# Altium PCB PCB2.PcbDoc
Units mil, origin at the board's own origin, x right, y up, seen from the top; angles counter-clockwise.
Board outline 7765 x 5060 mil, 2 copper layers (Top Layer, Bottom Layer); 92 components, 76 nets, 300 pads, 28 vias.
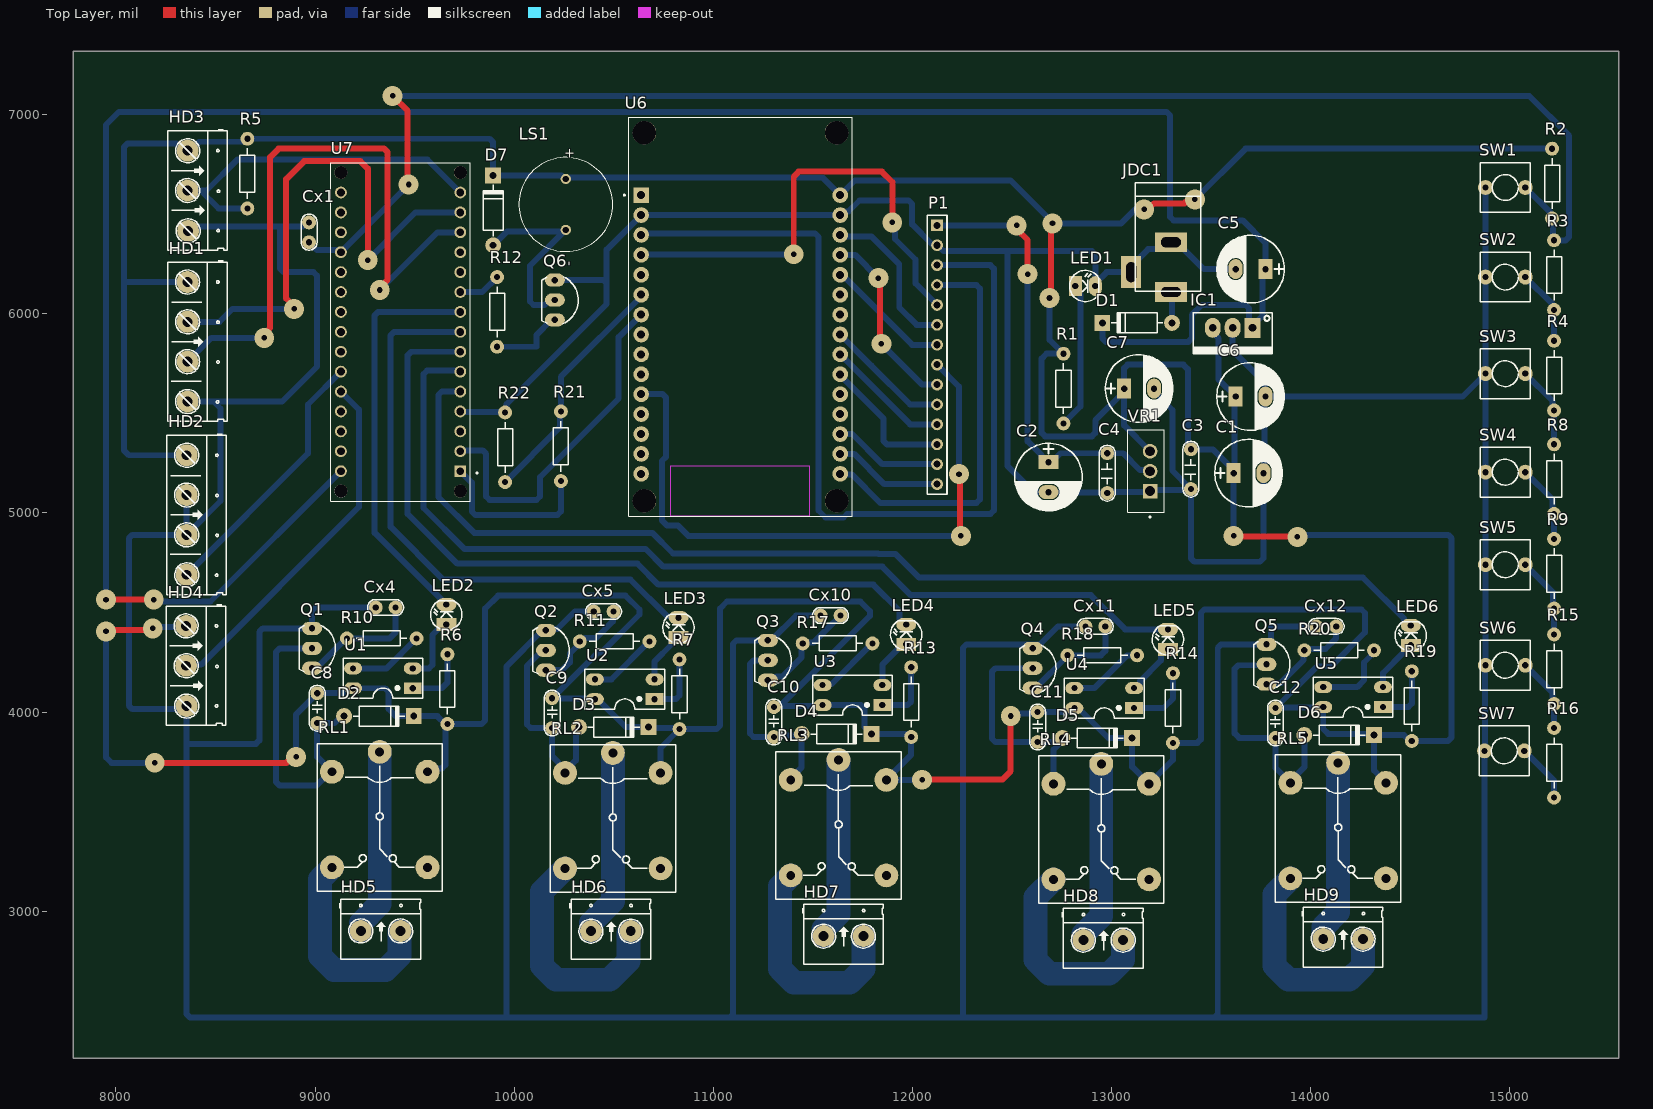
[diagram p0: Top Layer view]
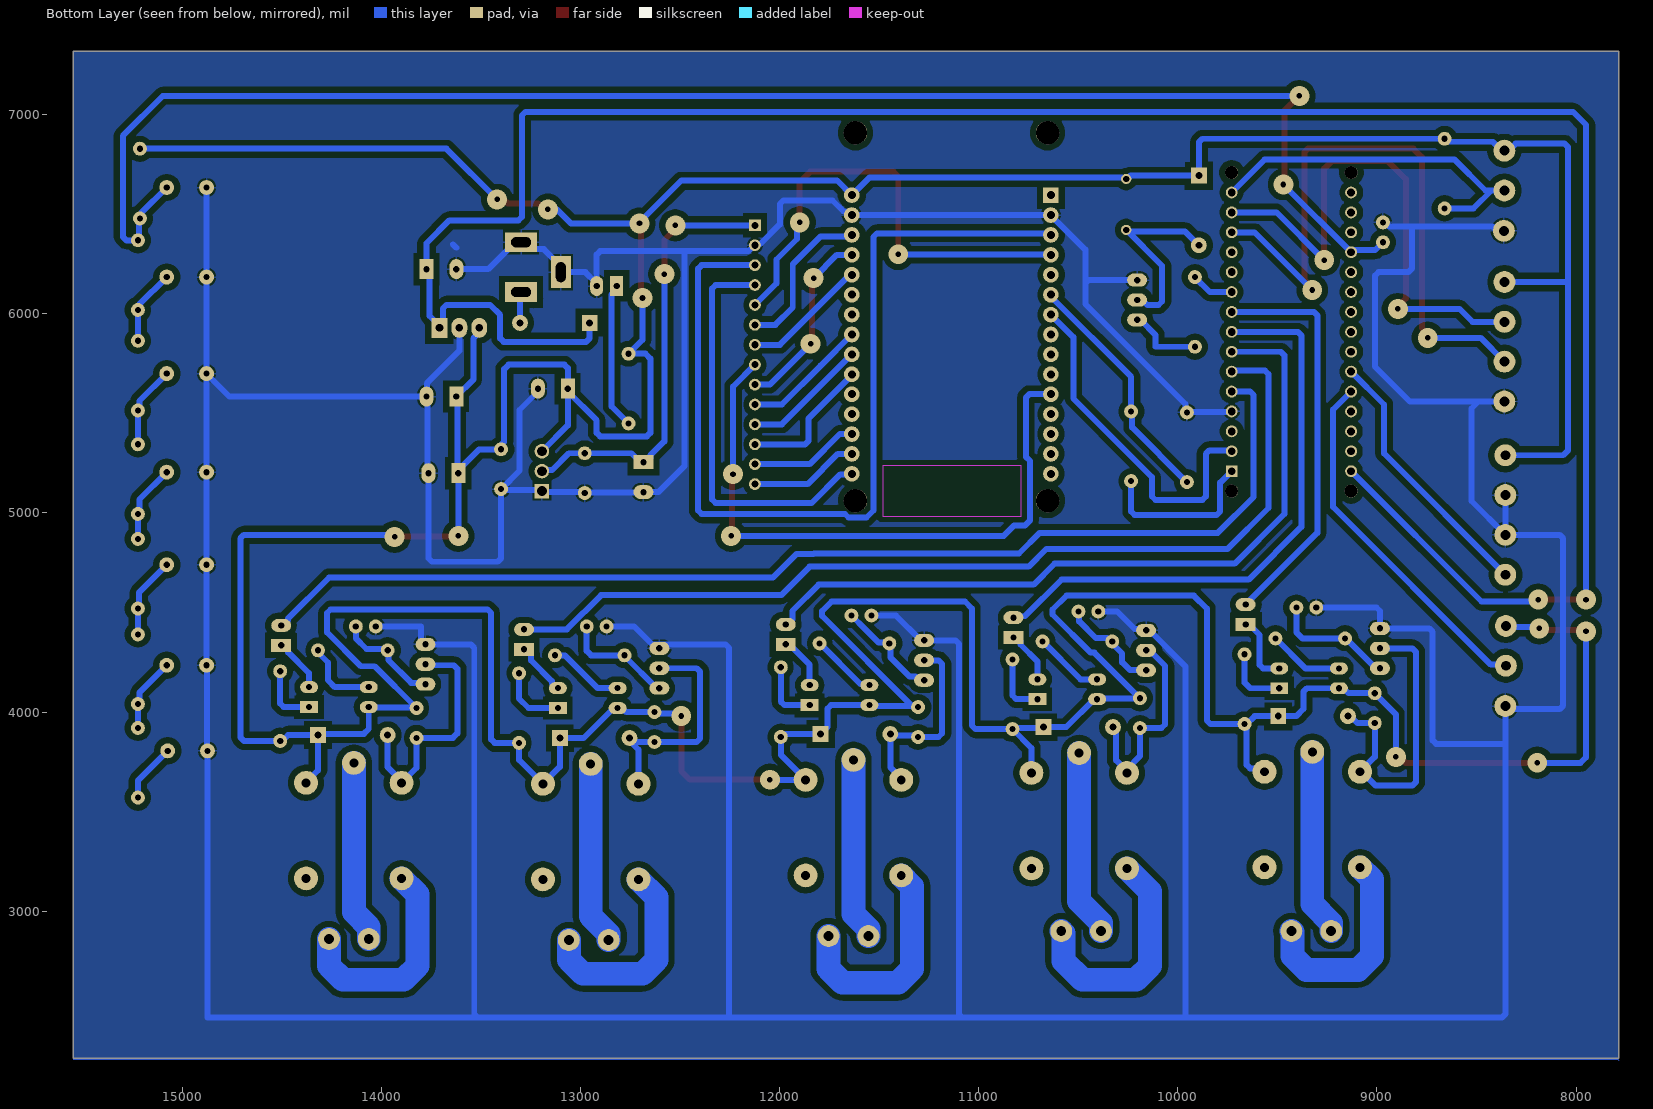
[diagram p1: Bottom Layer view, seen from below]
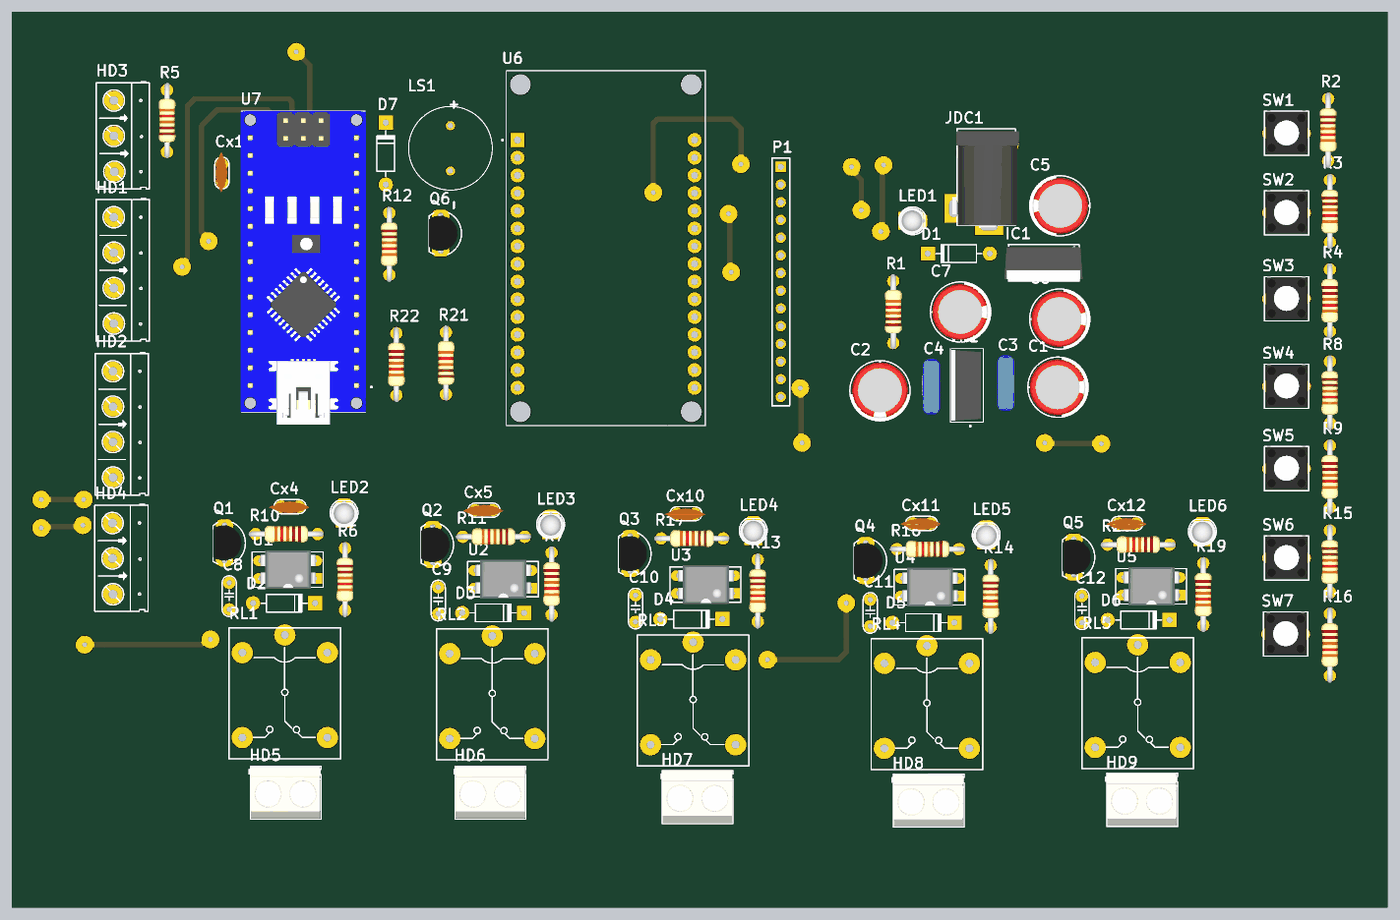
[diagram p2: 3D render of the assembled board from above, using the file's embedded part models]

## Layer stack, top to bottom
Top Solder: solder mask 0.4, Solder Resist, Dk 3.5
Top Layer: signal copper 1.4
Dielectric 1: dielectric 12.6, FR-4, Dk 4.8
Bottom Layer: signal copper 1.4
Bottom Solder: solder mask 0.4, Solder Resist, Dk 3.5

## Board outline
7785,2260 15550,2260 15550,7320 7785,7320

## Design rules (kind name [scope] priority, off if disabled: settings)
Clearance [All] p1: gap=10 ignorepadtopadclearanceinfootprint=FALSE except(0: Arc-Hole Track-Hole SMDPad-Hole THPad-Hole Via-Hole Fill-Hole Poly-Hole Region-Hole Text-Hole; 30: Arc-Fill Arc-Poly Arc-Region Track-Fill Track-Poly Track-Region SMDPad-Fill SMDPad-Poly SMDPad-Region THPad-Fill THPad-Poly THPad-Region Via-Fill Via-Poly Via-Region Fill-Fill Fill-Poly Fill-Region Poly-Poly Poly-Region Region-Region)
PolygonConnect [All] p1: connectstyle=Relief reliefconductorwidth=10 reliefentries=4 polygonreliefangle="90 Angle" airgapwidth=10
RoutingLayers [All] p1: top layer_v5=FALSE bottom layer_v5=TRUE
RoutingVias [All] p1: holewidth=28 width=50 viastyle="Through Hole" minholewidth=28 minwidth=50 maxholewidth=28 maxwidth=50
SolderMaskExpansion [All] p1: expansion=4 istentingtop=FALSE
Width [All] p1: maxlimit=180 minlimit=28 preferedwidth=30
29 further rules are at their usual default settings.

## Components (designator, comment, footprint, x,y, rotation, side; value= is the part's Value field where it differs from the comment)
C1 "100uF/35V" CP1.5/3.4 13615,5200 r0 top value=100uF/35V/50V
C2 "100uF/35V" CP1.5/3.4 12685,5255 r270 top value=100uF/35V/50V
C3 "104" CN2 13400,5120 r90 top value=0.1uF
C4 "104" CN2 12980,5100 r90 top value=0.1uF
C5 "220uF/35V" CP1.5/3.4 13775,6225 r180 top value=100uF/35V/50V
C6 "0.1uF/35V" CP1.5/3.4 13625,5585 r0 top value=100uF/35V/50V
C7 "10uF/35V" CP1.5/3.4 13065,5625 r0 top value=100uF/35V/50V
C8 "103" CN1.5 9011.07,4094.5 r270 top value=0.01uF
C9 "103" CN1.5 10191.07,4069.5 r270 top value=0.01uF
C10 "103" CN1.5 11305,4024.5 r270 top value=0.01uF
C11 "103" CN1.5 12630,3999.5 r270 top value=0.01uF
C12 "103" CN1.5 13825,4020 r270 top value=0.01uF
Cx1 "33pF" CN1 8970,6360 r90 top
Cx4 "33pF" CN1 9405,4525 r180 top
Cx5 "33pF" CN1 10500,4505 r180 top
Cx10 "33pF" CN1 11640,4485 r180 top
Cx11 "33pF" CN1 12970,4430 r180 top
Cx12 "33pF" CN1 14130,4430 r180 top
D1 "1N4007" D1A 13305,5955 r0 top
D2 "1N4007" D1A 9146.07,3979.5 r180 top
D3 "1N4007" D1A 10326.07,3924.5 r180 top
D4 "1N4007" D1A 11445,3889.5 r180 top
D5 "1N4007" D1A 12755,3869.5 r180 top
D6 "1N4007" D1A 13970,3884.5 r180 top
D7 "1N4007" D1A 9895,6345 r270 top
HD1 "Header 4" HED4 8359.61,6160.39 r270 top
HD2 "Header 4" HED4 8355,5290 r270 top
HD3 "Header 3" HED3 8360,6820 r270 top
HD4 "Header 3" HED3 8352.38,4432.62 r270 top
HD5 "Header 2" HED2 9230,2900 r0 top
HD6 "Header 2" HED2 10386.07,2899.5 r0 top
HD7 "Header 2" HED2 11555,2874.5 r0 top
HD8 "Header 2" HED2 12860,2854.5 r0 top
HD9 "Header 2" HED2 14065,2859.5 r0 top
IC1 "LM7805" QTO-220 13710,5930 r180 top
JDC1 "Jac DC" DC-IN 13200,6235 r270 top
LED1 "LED" LED-3 12820,6140 r0 top value="LED 3 ly Single Colour"
LED2 "LED" LED-3 9660,4440 r90 top value="LED 3 ly Single Colour"
LED3 "LED" LED-3 10826.07,4374.5 r90 top value="LED 3 ly Single Colour"
LED4 "LED" LED-3 11970,4340 r90 top value="LED 3 ly Single Colour"
LED5 "LED" LED-3 13285,4315 r90 top value="LED 3 ly Single Colour"
LED6 "LED" LED-3 14505,4335 r90 top value="LED 3 ly Single Colour"
LS1 "CCG-1206" CUI_CCG-1206 10260,6550 r270 top
P1 "Header 14" HDR1X14 12125,6445 r270 top
Q1 "C1815" QTO-92 8985,4320 r270 top
Q2 "C1815" QTO-92 10160,4310 r270 top
Q3 "C1815" QTO-92 11275,4260 r270 top
Q4 "C1815" QTO-92 12605,4220 r270 top
Q5 "C1815" QTO-92 13780,4240 r270 top
Q6 "C1815" QTO-92 10205,6070 r270 top
R1 "330" R1/4W 12760,5800 r270 top value="R1/4W - 1K"
R2 "2k" R1/4W 15215,6480 r90 top value="R1/4W - 1K"
R3 "1k" R1/4W 15225,6020 r90 top value="R1/4W - 1K"
R4 "1k" R1/4W 15225,5515 r90 top value="R1/4W - 1K"
R5 "1k" R1/4W 8660,6880 r270 top value="R1/4W - 1K"
R6 "1k" R1/4W 9665,3940 r90 top value="R1/4W - 1K"
R7 "1k" R1/4W 10831.07,3914.5 r90 top value="R1/4W - 1K"
R8 "1k" R1/4W 15225,4995 r90 top value="R1/4W - 1K"
R9 "1k" R1/4W 15225,4520 r90 top value="R1/4W - 1K"
R10 "1k" R1/4W 9160,4370 r0 top value="R1/4W - 1K"
R11 "1k" R1/4W 10330,4355 r0 top value="R1/4W - 1K"
R12 "180R" R1/4W 9915,5835 r90 top value="R1/4W - 1K"
R13 "1k" R1/4W 11995,3875 r90 top value="R1/4W - 1K"
R14 "1k" R1/4W 13310,3845 r90 top value="R1/4W - 1K"
R15 "1k" R1/4W 15225,4040 r90 top value="R1/4W - 1K"
R16 "1k" R1/4W 15225,3570 r90 top value="R1/4W - 1K"
R17 "1k" R1/4W 11450,4345 r0 top value="R1/4W - 1K"
R18 "1k" R1/4W 12780,4285 r0 top value="R1/4W - 1K"
R19 "1k" R1/4W 14510,3855 r90 top value="R1/4W - 1K"
R20 "1k" R1/4W 13970,4310 r0 top value="R1/4W - 1K"
R21 "1k" R1/4W 10235,5510 r270 top value="R1/4W - 1K"
R22 "2k" R1/4W 9955,5155 r90 top value="R1/4W - 1K"
RL1 "Relay 10A/5V" RL_SPDT_10A 9325,3800 r270 top value="Relay SPDT, 10A, 12V"
RL2 "Relay 10A/5V" RL_SPDT_10A 10496.07,3794.5 r270 top value="Relay SPDT, 10A, 12V"
RL3 "Relay 10A/5V" RL_SPDT_10A 11630,3759.5 r270 top value="Relay SPDT, 10A, 12V"
RL4 "Relay 10A/5V" RL_SPDT_10A 12950,3739.5 r270 top value="Relay SPDT, 10A, 12V"
RL5 "Relay 10A/5V" RL_SPDT_10A 14140,3744.5 r270 top value="Relay SPDT, 10A, 12V"
SW1 "SW" SW2 14880,6635 r0 top value="SW chip 2 pin"
SW2 "SW" SW2 14880,6185 r0 top value="SW chip 2 pin"
SW3 "SW" SW2 14880,5700 r0 top value="SW chip 2 pin"
SW4 "SW" SW2 14880,5205 r0 top value="SW chip 2 pin"
SW5 "SW" SW2 14880,4740 r0 top value="SW chip 2 pin"
SW6 "SW" SW2 14880,4235 r0 top value="SW chip 2 pin"
SW7 "SW" SW2 14875,3805 r0 top value="SW chip 2 pin"
U1 "PC817" DIP4/W0.3 9491.07,4119.5 r90 top
U2 "PC817" DIP4/W0.3 10706.07,4064.5 r90 top
U3 "PC817" DIP4/W0.3 11850,4035 r90 top
U4 "PC817" DIP4/W0.3 13115,4020 r90 top
U5 "PC817" DIP4/W0.3 14365,4025 r90 top
U6 "ESP32-DEVKIT-V1" MODULE_ESP32_DEVKIT_V1 11138.46,5985.79 r0 top
U7 "ARDUINO_NANO_A000005" MODULE_ARDUINO_NANO_A000005 9430,5910 r180 top
VR1 "LM1117T-3.3/NOPB" TO254P1054X470X1955-3 13195,5210 r90 top

## Footprints (in the part's own frame and the unit in brackets; to place one, negate y for a bottom-side part, rotate by r counter-clockwise, add the part's x,y. Pads: shape width x height; smd on the part's side, far side on the other; paste and mask are expansions set on the pad)
CN1 [mil]
  round 70 hole 31: 1(0,0) 2(100,0)
  silkscreen extent -40,-40 141,40, body extent -60,-30 170,37, height 265
CN1.5 [mil]
  round 70 hole 31: 1(0,0) 2(150,0)
  silkscreen extent -40,-40 190,40
CN2 [mil]
  round 70 hole 31: 1(0,0) 2(200,0)
  silkscreen extent -40,-40 240,40, body extent -54,-44 260,55, height 407
CP1.5/3.4 [mil] "Tu hoa 220->470uF,16V, 470uF/16V,25V"
  rect 70x100 hole 32: 1(0,0)
  oval 70x100 hole 32: 2(150,0)
  silkscreen extent -95,-170 245,170, body extent -85,-157 230,157, height 446
CUI_CCG-1206 [mm]
  round 1.308 hole 0.8: M(3.25,0) P(-3.25,0)
  silkscreen extent -6,-6 6,6
D1A [mil] "Diode 1A, W 100mil, L 350mil"
  round 80 hole 35: 1(0,0)
  rect 80x80 hole 35: 2(-350,0)
  silkscreen extent -305,-50 -45,50, body extent -366,-42 16,41, height 100
DC-IN [mil] "Jac DC input"
  rect 100x160 hole 50 slot 100 at 90 deg: 1(125,100) 2(-125,100)
  rect 160x100 hole 50 slot 100 at 0 deg: 3(25,-100)
  silkscreen extent -425,-80 120,250, body extent -410,-105 134,269, height 434
DIP4/W0.3 [mil] "4 PIN, W 300mil, Pin to pin 100mil"
  rect 60x90 hole 31: 1(0,0)
  oval 60x90 hole 31: 2(100,0) 3(100,300) 4(0,300)
  silkscreen extent -50,-50 150,350, body extent -59,-10 159,305, height 170
HDR1X14 [mm] "Connector; Header; 14 Position"
  rect 1.5x1.5 hole 0.9: 1(0,0)
  round 1.5 hole 0.9: 2(2.54,0) 3(5.08,0) 4(7.62,0) 5(10.16,0) 6(12.7,0) 7(15.24,0) 8(17.78,0) 9(20.32,0) 10(22.86,0) 11(25.4,0) 12(27.94,0) 13(30.48,0) 14(33.02,0)
  silkscreen extent -1.27,-1.27 34.29,1.27, body extent -1.27,-1.27 34.29,1.27, height 7
HED2 [mil] "Header 2, 2 pin, hight 300mil, Pin to Pin 200, Colour Green"
  round 110 hole 50: 1(0,0) 2(200,0)
  silkscreen extent -106,-141 300,159, body extent -98,-136 296,159, height 394
HED3 [mil] "Header 3, 3 pin, hight 300mil, Pin to Pin 200, Colour Green"
  round 110 hole 50: 1(0,0) 2(200,0) 3(402.62,2.62)
  silkscreen extent -106,-100 500,200
HED4 [mil] "Header 4, 4 pin, hight 300mil, Pin to Pin 200, Colour Green"
  round 110 hole 50: 1(0,0) 2(200,0) 3(400.06,0.06) 4(600.39,0.39)
  silkscreen extent -106,-100 700,200
LED-3 [mil] "LED 2 PIN, 3ly Only colour"
  rect 65x100 hole 32: 1(0,0)
  oval 65x100 hole 32: 2(100,0)
  silkscreen extent -29,-78 118,79, body extent -29,-75 109,75, height 256
MODULE_ARDUINO_NANO_A000005 [mm]
  rect 1.508x1.508 / inner round 1.508 / far side rect 1.508x1.508 hole 1: 1(-7.62,17.78)
  round 1.508 hole 1: 2(-7.62,15.24) 3(-7.62,12.7) 4(-7.62,10.16) 5(-7.62,7.62) 6(-7.62,5.08) 7(-7.62,2.54) 8(-7.62,0) 9(-7.62,-2.54) 10(-7.62,-5.08) 11(-7.62,-7.62) 12(-7.62,-10.16) 13(-7.62,-12.7) 14(-7.62,-15.24) 15(-7.62,-17.78) 16(7.62,-17.78) 17(7.62,-15.24) 18(7.62,-12.7) 19(7.62,-10.16) 20(7.62,-7.62) 21(7.62,-5.08) 22(7.62,-2.54) 23(7.62,0) 24(7.62,2.54) 25(7.62,5.08) 26(7.62,7.62) 27(7.62,10.16) 28(7.62,12.7) 29(7.62,15.24) 30(7.62,17.78)
  round 1.651 hole 1.651 unplated: ""(-7.62,20.32) ""(-7.62,-20.32) ""(7.62,20.32) ""(7.62,-20.32)
  silkscreen extent -9.85,-21.59 8.89,21.59, body extent -9,-21.6 9,23.4, height 12.6
MODULE_ESP32_DEVKIT_V1 [mm]
  rect 2x2 / inner round 2 / far side rect 2x2 hole 1.02: 1(-12.7,15.515)
  round 2 hole 1.02: 2(-12.7,12.975) 3(-12.7,10.435) 4(-12.7,7.895) 5(-12.7,5.355) 6(-12.7,2.815) 7(-12.7,0.275) 8(-12.7,-2.265) 9(-12.7,-4.805) 10(-12.7,-7.345) 11(-12.7,-9.885) 12(-12.7,-12.425) 13(-12.7,-14.965) 14(-12.7,-17.505) 15(-12.7,-20.045) 16(12.7,-20.045) 17(12.7,-17.505) 18(12.7,-14.965) 19(12.7,-12.425) 20(12.7,-9.885) 21(12.7,-7.345) 22(12.7,-4.805) 23(12.7,-2.265) 24(12.7,0.275) 25(12.7,2.815) 26(12.7,5.355) 27(12.7,7.895) 28(12.7,10.435) 29(12.7,12.975) 30(12.7,15.515)
  round 3 hole 3 unplated: ""(-12.28,-23.475) ""(-12.28,23.475) ""(12.23,-23.475) ""(12.23,23.475)
  Keep-Out Layer region: 8.78,-25.475 -8.91,-25.475 -8.91,-18.985 8.78,-18.985
  Keep-Out Layer region: 8.78,-25.475 -8.91,-25.475 -8.91,-18.985 8.78,-18.985
  silkscreen extent -14.95,-25.48 14.23,25.48
QTO-92 [mil] "TO-92"
  oval 66x100 hole 32: 1(-100,0) 2(0,0) 3(100,0)
  silkscreen extent -117,-65 120,118, body extent -109,-66 109,95, height 385
QTO-220 [mil] "TO-220 - 1-2-3"
  rect 80x100 hole 39: 1(0,0)
  oval 80x100 hole 39: 2(100,0) 3(200,0)
  silkscreen extent -100,-76 300,130, body extent -119,-64 322,121, height 755
R1/4W [mil] "R 1/4W, 2 Pin, 350mil"
  round 70 hole 31: 1(0,0) 2(350,0)
  silkscreen extent 48,-38 302,38, body extent -40,-47 386,47, height 111
RL_SPDT_10A [mil] "Relay SPDT, 5 pin, 10A,W 650mil, L 800mil, H 800mil"
  round 120 hole 45: 1(0,0) 2(580,240) 3(580,-240) 4(100,-240) 5(100,240)
  silkscreen extent -40,-315 700,315, body extent -40,-315 700,315, height 630
SW2 [mil] "SW button 2pin, 250x 250 mil"
  round 75 hole 31: 1(0,0) 2(200,0)
  silkscreen extent -25,-125 225,125, body extent -18,-116 218,128, height 197
TO254P1054X470X1955-3 [mm]
  rect 1.86x1.86 / inner round 1.86 / far side rect 1.86x1.86 hole 1.24: 1(-2.54,0)
  round 1.86 hole 1.24: 2(0,0) 3(2.54,0)
  silkscreen extent -5.94,-1.84 5.27,2.86, body extent -5.08,-1.49 5.08,2.71, height 22.86

## Part data
C1 C2 C5 C6 C7: library part CP3, "Cap 100uF/35V - 470uF/16V", Description 1="1000uF/6,3V - 470uF/16V - 330uF - 25V", Description 2="220uF/35V - 100uF/50V - 63V - 4,7uF/200V", Description 3="22uF => 33uF100V - 3,3uF => 4,7uF/250V", Description 4="2,2uF =>3,3uF/350 - 2,2uF/400V - 1uF/450V"
C3 C4: library part CN2, "Cap np 104 => 105pF"
C8 C9 C10 C11 C12: library part CN1.5, "Cap np 682pF => 104pF"
Cx1 Cx4 Cx5 Cx10 Cx11 Cx12: library part CN0, "Cremic For Xtal 1pF => 100pF"
D1 D2 D3 D4 D5 D6 D7: library part D1A, "Diode 1A"
HD1 HD2: library part Hed4, "Header 4 (Green)"
HD3 HD4: library part Hed3, "Header 3 (Green)"
HD5 HD6 HD7 HD8 HD9: library part Hed2, "Header 2 (Green)"
IC1: library part LM78xx, "On ap +, from + 5 to + 24VDC"
JDC1: library part DCIN, "Jac DC input"
LED1 LED2 LED3 LED4 LED5 LED6: "LED Single colour Green and Red"
LS1: "12 mm, 5 V, 85 dB, Through Hole, Sealed, Magnetic Audio Transducer Buzzer", Package=None, Availability=Unavailable, MP=CCG-1206, Price=None
P1: "Header, 14-Pin", LatestRevisionDate=17-Jul-2002, LatestRevisionNote="Re-released for DXP Platform.", Publisher="Altium Limited"
Q1 Q2 Q3 Q4 Q5 Q6: "NPN 600mW, ECB"
R1 R2 R3 R4 R5 R6 R7 R8 R9 R10 R11 R12 R13 R14 R15 R16 R17 R18 R19 R20 R21 R22: library part R1/4W, "Resistor 1/4W"
RL1 RL2 RL3 RL4 RL5: library part "Relay 1", "Relay SPDT,10A - 12VDC 5 Pin"
SW1 SW2 SW3 SW4 SW5 SW6 SW7: library part SW2, "Switch button 2 pin"
U1 U2 U3 U4 U5: "Single Opto"
U6: "Dual core, Wi-Fi: 2.4 GHz up to 150 Mbits/s,BLE (Bluetooth Low Energy) and legacy Bluetooth, 32 bits, Up to 240 MHz", Package=None, Availability="Not in stock", Check_prices=https://www.snapeda.com/parts/ESP32-DEVKIT-V1/Do+it/view-part/?ref=eda, MF="Do it", MP=ESP32-DEVKIT-V1, Price=None, SnapEDA_Link=https://www.snapeda.com/parts/ESP32-DEVKIT-V1/Do+it/view-part/?ref=snap
U7: "ATSAMD21G18A Arduino Nano 33 IoT series ARMÂ® CortexÂ®-M0+ MCU 32-Bit Embedded Evaluation Board", Package="Non-Standard Arduino", Check_prices=https://www.snapeda.com/parts/ARDUINO%20NANO%20A000005/Arduino/view-part/?ref=eda, MF=Arduino, MP="ARDUINO NANO A000005", SnapEDA_Link=https://www.snapeda.com/parts/ARDUINO%20NANO%20A000005/Arduino/view-part/?ref=snap
VR1: "800-mA 15-V linear voltage regulator", Package="TO-220-3 Texas Instruments", Availability="In Stock", Check_prices=https://www.snapeda.com/parts/LM1117T-3.3/NOPB/Texas+Instruments/view-part/?ref=eda, MF="Texas Instruments", MP=LM1117T-3.3/NOPB, Price=None, Purchase-URL=https://pricing.snapeda.com/search/part/LM1117T-3.3/NOPB/?ref=eda, SnapEDA_Link=https://www.snapeda.com/parts/LM1117T-3.3/NOPB/Texas+Instruments/view-part/?ref=snap

## Via types
v1: diameter 100, hole 28, Top Layer to Bottom Layer, 28 vias

## Nets (pads, with @x,y where several pads share a name; then routed paths per layer and width w, separated by ;. In a path a pad name is that pad's centre, name@x,y a point inside that pad or via, vN(x,y) a via of type N, cw(c..) or ccw(c..) an arc to the next point about the centre after c; other vN are vias at no path point)
3.3V: C2.1 C4.2 P1.1 VR1.2 | length 2231
  Top Layer w30: v1(12525,6445) 12525,6426.06 12580,6371.06 v1(12580,6200)
  Bottom Layer w30: P1.1 v1(12525,6445) ; v1(12580,6200) 12580,5360 12650,5290 12650,5275 12670,5255 C2.1 12700,5255 12745,5300 C4.2 13060,5300 13144.79,5215.21 13189.79,5215.21 VR1.2
5V: C1.1 C3.2 C6.1 C7.1 C8.1 C9.1 C10.1 C11.1 C12.1 D2.2 D3.2 D4.2 D5.2 D6.2 D7.2 HD1.1 HD2.1 HD3.1 HD4.1 IC1.3 LS1.P R1.1 R2.2 R5.1 R6.1 R7.1 R13.1 R14.1 R19.1 RL1.5 RL2.5 RL3.5 RL4.5 RL5.5 U1.4 U2.4 U3.4 U4.4 U5.4 U6.30 VR1.3 | length 32096.3
  Top Layer w30: v1(7950,4405) 7957.5,4412.5 8177.5,4412.5 v1(8185,4420) ; v1(8195,3745) 8856.06,3745 8886.06,3775 v1(8905,3775) ; v1(12050,3660) 12452.43,3660 12495,3702.57 v1(12495,3980) v1@12481.61,3966.61 ; v1(12690,6080) 12697.5,6087.5 12697.5,6447.5 v1(12705,6455) ; v1(13165,6525) 13183.94,6525 13213.94,6555 13367.43,6555 13374.03,6561.61 13406.61,6561.61 v1(13420,6575) ; v1(13615,4885) 13617.5,4882.5 13932.5,4882.5 v1(13935,4880)
  Bottom Layer w30: v1(7950,4405) 7950,3772.57 7977.57,3745 v1(8195,3745) ; v1(8185,4420) 8191.31,4426.31 8346.07,4426.31 HD4.1 ; HD2.1 8065,5290 8040,5315 8040,6160 ; HD1.1 8040.39,6160.39 8040,6160 ; v1(8905,3775) 8905,3988.43 C8.1 9142.96,4094.5 9167.96,4119.5 U1.4 9352.43,4119.5 9370,4101.93 9370,4015 9405.5,3979.5 D2.2 9614.68,3979.5 9654.18,3940 R6.1 ; RL1.5 9582.22,3717.22 9637.43,3717.22 9655,3734.79 9655,3919.18 9665,3929.18 R6.1 ; RL2.5 10736.07,3819.5 R7.1 ; C10.1 11329.5,4024.5 C10.1@11334.75,4029.75 ; C10.1@11329.5,4029.75 C10.1@11334.75,4029.75 ; v1(12050,3660) 12045,3660 12044.5,3659.5 RL3.5 11995,3784.5 R13.1 11984.18,3875 11969.68,3889.5 D4.2 11760,3924.5 11760,4017.43 11742.43,4035 U3.4 11544.75,4029.75 C10.1@11334.75,4029.75 ; v1(12495,3980) 12506.85,3991.85 12622.35,3991.85 C11.1 12771.38,3999.5 12791.88,4020 U4.4 12835,4020 12985.5,3869.5 D5.2 13105,3724.5 RL4.5 13310,3759.5 R14.1 13432.43,3845 13450,3862.57 13450,4497.43 13467.57,4515 14257.43,4515 14275,4497.43 14275,4400 14105,4230 14035,4230 C12.1 13827.5,4022.5 14062.5,4022.5 U5.4 14065,3915 14090,3890 14314.5,3890 D6.2 ; v1(12690,6080) 12690,5870 R1.1 12675,5800 12650,5775 12650,5402.57 12667.57,5385 12902.43,5385 12920,5402.57 12920,5465 C7.1@13065,5610 ; v1@13150,6525 13120,6525 13050,6455 v1(12705,6455) 12705,6460 12495,6670 11711.85,6670 U6.30 11550.08,6685 10282.25,6685 10279.31,6682.06 10264.11,6682.06 LS1.P 10254.18,6677.95 10237.14,6695 D7.2 9895,6862.43 9877.43,6880 R5.1 8649.18,6880 8634.18,6865 8417.57,6865 8372.57,6820 8338.35,6820 8303.35,6855 8057.57,6855 8040,6837.43 8040,6160 ; VR1.3 13065,5440 C7.1@13065,5610 ; v1(13420,6575) 13675,6830 R2.2 ; IC1.3 13510,5907.43 13540,5877.43 13540,5670 C6.1 13620,5580 13620,5205 C1.1 ; v1(13615,4885) C1.1 ; v1@13930,4890 14692.43,4890 14710,4872.43 14710,3872.57 14692.43,3855 14499.18,3855 14469.68,3884.5 D6.2 ; RL5.5 14380,3647.07 14320,3707.07 D6.2 ; R6.1 9837.43,3940 9855,3957.57 9855,4520 9920,4585 10560,4585 10630.07,4514.93 10630.07,4490.07 10438.58,4298.58 10420.15,4298.58 C9.1 10193.57,4067 10403.57,4067 U2.4 10421.07,4064.5 10561.07,3924.5 D3.2 10681.07,3919.5 10826.07,3919.5 R7.1 ; R7.1 11017.43,3914.5 11035,3932.07 11035,4520 11070,4555 11740,4555 11787.57,4507.43 11787.57,4482.57 C10.1@11334.75,4029.75 ; C7.1@13065,5610 C7.1 13065,5727.43 13082.57,5745 13362.43,5745 13385,5722.43 13385,5357.57 13392.35,5350.23 13392.35,5327.65 C3.2 13510,5320 13615,5215 C1.1
Ao_arduino: Cx1.1 R2.1 R3.2 SW1.2 U7.19 | length 8047.3
  Top Layer w30: v1(9390,7095) 9465,7020 9465,6655 v1(9470,6650)
  Bottom Layer w30: Cx1.1 9010,6320 9112.05,6320 9122.05,6310 U7.19 v1(9470,6650) ; v1(9390,7095) 15100,7095 15300,6895 15300,6387.57 15282.43,6370 R3.2 15220,6375 15220,6475 R2.1 15207.35,6487.65 15207.35,6507.65 SW1.2
buzzer: R12.2 U7.10 | length 216.1
  Bottom Layer w30: U7.10 9840,6110 R12.2
CS: P1.3 U6.3 | length 4693.3
  Bottom Layer w30: U6.3 10646.85,6405 11511.56,6405 11529.13,6387.43 11529.13,5012.57 11564.19,4977.52 11654.78,4977.52 11672.26,4995 12392.43,4995 12410,5012.57 12410,6227.43 12392.43,6245 P1.3
D/C: P1.5 U6.4 | length 2395.7
  Top Layer w30: v1(11405,6300) 11405,6690 11430,6715 11847.43,6715 11900,6662.43 v1(11900,6460)
  Bottom Layer w30: U6.4 10640.16,6298.31 11403.31,6298.31 v1(11405,6300) ; v1(11900,6460) 11913.39,6446.61 11913.39,6376.61 12016.42,6273.58 12016.42,6153.58 P1.5
DS18B20_digital: HD3.2 R5.2 U7.15 | length 1774.8
  Bottom Layer w30: HD3.2 8425,6620 ; R5.2 8515,6530 8425,6620 ; U7.15 9565,6775 8610,6775 8455,6620 8425,6620
GND: C1.2 C2.2 C3.1 C4.1 C5.2 C6.2 C7.2 Cx1.2 Cx4.2 Cx5.2 Cx10.2 Cx11.2 Cx12.2 HD1.4 HD2.2 HD2.3 HD3.3 HD4.3 IC1.2 JDC1.2 JDC1.3 LED1.2 P1.2 Q1.1 Q2.1 Q3.1 Q4.1 Q5.1 Q6.1 R22.2 SW1.1 SW2.1 SW3.1 SW4.1 SW5.1 SW6.1 SW7.1 U6.2 U6.29 U7.4 VR1.1 | length 39195.3
  Bottom Layer w30: HD2.2 HD2.3@8355.03,4889.97 ; HD1.4 8490,5560 ; HD3.3 8377.93,6432.69 8412.88,6432.69 8420.19,6440 8825,6440 ; Cx1.2 8959.18,6460 8939.18,6440 8825,6440 ; Cx4.2 9002.57,4525 8985,4507.43 Q1.1 8737.57,4420 8720,4402.43 8720,3857.57 8702.43,3840 8355,3840 ; U7.4 9732.5,5507.5 9952.5,5507.5 R22.2 9962.65,5512.65 9962.65,5547.65 10465,6050 10465,6170 10465,6323.15 U6.2 11651.65,6496.61 11669.74,6514.7 11679.7,6514.7 11735,6570 11982.43,6570 12000,6552.43 12000,6450 12099.44,6350.56 12119.44,6350.56 P1.2 12127.1,6345 12157.1,6315 12480,6315 ; Q6.1 10450,6170 10460,6160 ; Cx5.2 10305,4505 10216.89,4416.89 10166.89,4416.89 Q2.1 10143,4410 9962.43,4229.43 9962.43,2467.43 9960,2465 ; Cx10.2 11417,4485 11292,4360 Q3.1 11117.57,4360 11100,4342.43 11100,2482.57 11082.43,2465 ; Q4.1@12622,4320 12637.13,4335.13 12732,4430 Cx11.2 ; Q4.1@12632.26,4340 12272.57,4340 12255,4322.43 12255,2465 ; LED1.2 LED1.2@12920,6152.9 ; C7.2 13215,5610 13307.5,5517.5 13307.5,5212.5 C3.1 ; IC1.2 13610,5815 13773.43,5651.57 13773.43,5586.57 C6.2 ; C5.2 13465,6225 13330,6360 JDC1.2 13265,6325 13185,6325 13100,6240 JDC1.3 12977.1,6210 LED1.2@12920,6152.9 ; 13625,6332.43 13642.57,6350 ; Cx12.2 13802.57,4430 13802.57,4356.63 13785.94,4340 Q5.1 13552.57,4340 13535,4322.43 13535,2482.57 13517.43,2465 ; SW1.1 SW2.1 SW3.1 ; 8355,3840 8355,2482.57 8372.57,2465 9960,2465 ; 8355,3840 HD4.3 8339.69,4014.69 8082.57,4014.69 8065,4032.27 8065,4872.36 8082.57,4889.94 HD2.3 ; HD2.3 8525,5059.88 8525,5525 8490,5560 ; 8490,5560 8835,5560 9010,5735 9010,6192.43 8992.43,6210 8842.57,6210 8825,6227.57 8825,6440 ; 9960,2465 11082.43,2465 ; 11082.43,2465 12255,2465 ; 12255,2465 13517.43,2465 ; 12480,6315 12480,5235 12610,5105 C2.2 12687.5,5102.5 12977.5,5102.5 C4.1 12985,5105 13190,5105 VR1.1 13200,5115 13395,5115 C3.1 ; 12480,6315 12902.43,6315 12920,6297.43 LED1.2@12920,6152.9 ; C3.1 13400,4772.57 13417.57,4755 13747.43,4755 13765,4772.57 C1.2 13770,5205 13770,5580 C6.2 ; 13517.43,2465 14875,2465 SW7.1 14877.5,3807.5 14877.5,4232.5 SW6.1 SW5.1 SW4.1 SW3.1 ; C6.2 14765,5585 SW3.1
LED: P1.8 U6.11 | length 3202.5
  Top Layer w30: v1(12235,5195) 12240,5190 12240,4890 v1(12245,4885)
  Bottom Layer w30: U6.11 10746.61,5596.61 10764.19,5579.04 10764.19,5282.37 10742.68,5260.86 10742.68,4962.57 10767.73,4937.52 10822.48,4937.52 10875,4885 v1(12245,4885) ; P1.8 12235,5635 v1(12235,5195)
MISO: P1.9 U6.27 | length 941
  Top Layer w30: v1(11830,6180) 11837.5,6172.5 11837.5,5857.5 v1(11845,5850)
  Bottom Layer w30: U6.27 11713.39,6296.61 v1(11830,6180) ; v1(11845,5850) 12050,5645 P1.9
MOSI: P1.6 U6.28 | length 801
  Bottom Layer w30: U6.28 11645.08,6390 11795,6390 11935,6250 11935,6032.57 12022.57,5945 P1.6
NetC8_2: C8.2 D2.1 Q1.2 RL1.4 | length 1583
  Bottom Layer w30: Q1.2 8822.57,4320 8805,4302.43 8805,3647.57 8822.57,3630 9006.51,3630 9076.51,3700 RL1.4 9085,3700.64 9011.07,3774.57 C8.2 9097.54,3944.5 9132.54,3979.5 D2.1
NetC9_2: C9.2 D3.1 Q2.2 RL2.4 | length 1066.2
  Bottom Layer w30: Q2.2 10143,4310 10065,4232 10065,3937.57 10083.07,3919.5 C9.2 10191.07,3777.99 10256.07,3712.99 RL2.4 10256.07,3703.15 10310,3757.07 10310,3894.9 10326.07,3910.97 D3.1
NetC10_2: C10.2 D4.1 Q3.2 RL3.4 | length 973.9
  Bottom Layer w30: Q3.2 11202.57,4260 11185,4242.43 11185,3892.07 11202.57,3874.5 C10.2 11312.5,3882 11437.5,3882 D4.1 11445,3722.07 11390,3667.07 RL3.4
NetC11_2: C11.2 D5.1 Q4.2 RL4.4 | length 1166.8
  Bottom Layer w30: Q4.2 12417.57,4220 12400,4202.43 12400,3867.07 12417.57,3849.5 C11.2 12721.47,3849.5 12741.47,3869.5 D5.1 12755,3855.97 12710,3810.97 RL4.4
NetC12_2: C12.2 D6.1 Q5.2 RL5.4 | length 1234.1
  Bottom Layer w30: Q5.2 13775,4235 13637.57,4235 13620,4217.43 13620,3892.57 13642.57,3870 C12.2 13825,3719.5 RL5.4 13900,3652.99 13970,3722.99 D6.1
NetCx4_1: Cx4.1 Q1.3 R10.1 | length 619.6
  Bottom Layer w30: Q1.3 9006,4220 9156,4370 R10.1 9375,4370 9405,4400 Cx4.1
NetCx5_1: Cx5.1 Q2.3 R11.1 | length 520.8
  Bottom Layer w30: Q2.3 10240,4210 10280,4250 10280,4294.18 10330,4344.18 R11.1 10340.82,4355 10357.39,4371.57 10411.57,4371.57 10495.93,4455.93 10495.93,4500.93 Cx5.1
NetCx10_1: Cx10.1 Q3.3 R17.1 | length 537.7
  Bottom Layer w30: Q3.3 11301.74,4160 11319.45,4177.71 11347.71,4177.71 11444.38,4274.38 11444.38,4339.38 11454.64,4349.64 11504.64,4349.64 11570,4415 Cx10.1
NetCx11_1: Cx11.1 Q4.3 R18.1 | length 567.2
  Bottom Layer w30: Q4.3 12618.5,4120 12780,4281.5 R18.1 12947.43,4285 12970,4307.57 Cx11.1
NetCx12_1: Cx12.1 Q5.3 R20.1 | length 531.6
  Bottom Layer w30: Q5.3 13786.89,4146.89 13851.89,4146.89 13965.93,4260.93 13965.93,4305.93 13976.57,4316.57 14076.57,4316.57 14130,4370 Cx12.1
NetD1_1: D1.1 JDC1.1 | length 236.6
  Bottom Layer w30: JDC1.1@13235,6075 13270,6110 JDC1.1 13305,6105 D1.1
NetD7_1: D7.1 LS1.M Q6.2 | length 973.6
  Bottom Layer w30: D7.1 9965.05,6415.05 10247.18,6415.05 10254.18,6422.05 LS1.M 10080,6242.05 10080,6062.57 10097.57,6045 10153.26,6045 10178.26,6070 Q6.2
NetHD5_1: HD5.1 RL1.1 | length 939.4
  Bottom Layer w120: HD5.1 9230,2940 9325,3035 RL1.1
NetHD5_2: HD5.2 RL1.3 | length 1054.6
  Bottom Layer w120: RL1.3 9025,3160 9025,2775.29 9095.29,2705 9354.71,2705 9425,2775.29 9425,2895 HD5.2
NetHD6_1: HD6.1 RL2.1 | length 940.6
  Bottom Layer w120: HD6.1 10386.07,2941.07 10496.07,3051.07 RL2.1
NetHD6_2: HD6.2 RL2.3 | length 1194.8
  Bottom Layer w120: RL2.3 10140,3098.43 10140,2725.29 10210.29,2655 10480,2655 10575,2750 10575,2888.43 HD6.2
NetHD7_1: HD7.1 RL3.1 | length 916.1
  Bottom Layer w120: HD7.1 11555,2910 11630,2985 RL3.1
NetHD7_2: HD7.2 RL3.3 | length 1134.4
  Bottom Layer w120: RL3.3 11335,3124.5 11335,2710.29 11405.29,2640 11684.71,2640 11755,2710.29 HD7.2
NetHD8_1: HD8.1 RL4.1 | length 922.3
  Bottom Layer w120: HD8.1 12860,2885 12950,2975 RL4.1
NetHD8_2: HD8.2 RL4.3 | length 1038.9
  Bottom Layer w120: RL4.3 12620,3069.5 12620,2755.29 12690.29,2685 12989.71,2685 13060,2755.29 HD8.2
NetHD9_1: HD9.1 RL5.1 | length 916.1
  Bottom Layer w120: HD9.1 14065,2920 14140,2995 RL5.1
NetHD9_2: HD9.2 RL5.3 | length 1109.8
  Bottom Layer w120: RL5.3 13820,3084.5 13820,2725.29 13890.29,2655 14194.71,2655 14265,2725.29 HD9.2
NetLED1_1: LED1.1 R1.2 | length 735.6
  Bottom Layer w30: R1.2 12845,5535 12845,6097.5 12820,6122.5 LED1.1
NetLED2_1: LED2.1 U1.2 | length 348.4
  Bottom Layer w30: U1.2 9572.43,4219.5 9590,4237.07 9590,4387.5 9642.5,4440 LED2.1
NetLED3_1: LED3.1 U2.2 | length 270
  Bottom Layer w30: U2.2 10706.07,4254.5 10791.07,4339.5 10791.07,4357 10808.57,4374.5 LED3.1
NetLED4_1: LED4.1 U3.2 | length 265
  Bottom Layer w30: U3.2 11850,4237.5 11952.5,4340 LED4.1
NetLED5_1: LED5.1 U4.2 | length 279.7
  Bottom Layer w30: U4.2 13121.88,4120 13145,4143.12 13145,4155 13250,4260 13250,4297.5 13267.5,4315 LED5.1
NetLED6_1: LED6.1 U5.2 | length 278.2
  Bottom Layer w30: U5.2 14365,4195 14470,4300 14470,4317.5 14487.5,4335 LED6.1
NetQ6_3: Q6.3 R12.1 | length 381.1
  Bottom Layer w30: R12.1 10113,5835 10113,5895 10188,5970 Q6.3
NetR3_1: R3.1 R4.2 SW2.2 | length 380.1
  Bottom Layer w30: SW2.2 15217.35,6047.65 15217.35,6027.65 R3.1 R4.2
NetR4_1: R4.1 R8.2 SW3.2 | length 415.1
  Bottom Layer w30: SW3.2 15217.35,5562.65 15217.35,5522.65 R4.1 R8.2
NetR6_2: R6.2 U1.1 | length 328.3
  Bottom Layer w30: U1.1 9637.43,4119.5 9665,4147.07 R6.2
NetR7_2: R7.2 U2.1 | length 314.1
  Bottom Layer w30: U2.1 10812.43,4064.5 10831.07,4083.15 R7.2
NetR8_1: R8.1 R9.2 SW4.2 | length 395.1
  Bottom Layer w30: SW4.2 15217.35,5067.65 15217.35,5002.65 R8.1 R9.2
NetR9_1: R9.1 R15.2 SW5.2 | length 410.1
  Bottom Layer w30: SW5.2 15220,4600 15220,4525 R9.1 R15.2
NetR10_2: R10.2 U1.3 | length 381.3
  Bottom Layer w30: U1.3 9359.5,4219.5 R10.2
NetR11_2: R11.2 U2.3 | length 352.8
  Bottom Layer w30: U2.3 10489.5,4164.5 R11.2
NetR13_2: R13.2 U3.1 | length 324.7
  Bottom Layer w30: U3.1 11977.43,4035 11995,4052.57 R13.2
NetR14_2: R14.2 U4.1 | length 342.1
  Bottom Layer w30: U4.1 13262.43,4020 13310,4067.57 R14.2
NetR15_1: R15.1 R16.2 SW6.2 | length 375.1
  Bottom Layer w30: SW6.2 15217.35,4097.65 15217.35,4047.65 R15.1 R16.2
NetR16_1: R16.1 SW7.2 | length 297.1
  Bottom Layer w30: SW7.2 15225,3655 R16.1
NetR17_2: R17.2 U3.3 | length 337
  Bottom Layer w30: U3.3 11555.74,4140.74 11595.74,4140.74 R17.2
NetR18_2: R18.2 U4.3 | length 383.3
  Bottom Layer w30: U4.3 12915,4120 13078.43,4283.43 13128.43,4283.43 R18.2
NetR19_2: R19.2 U5.1 | length 314.7
  Bottom Layer w30: U5.1 14492.43,4025 14510,4042.57 R19.2
NetR20_2: R20.2 U5.3 | length 390.2
  Bottom Layer w30: U5.3 14235,4125 14269.92,4159.92 14269.92,4249.1 14320,4299.18 R20.2
NetR21_2: R21.2 U7.1 | length 840.7
  Bottom Layer w30: U7.1 9787.5,5152.5 9787.5,5007.57 9805.07,4990 10217.43,4990 10235,5007.57 R21.2
pH4502C-Analog: HD2.4 U7.25 | length 1341.2
  Bottom Layer w30: HD2.4 8965,5299.21 8965,5545 U7.25
R_doduc: LED3.2 U7.8 | length 2954.5
  Bottom Layer w30: U7.8 9397.57,5910 9380,5892.43 9380,4930 9645,4665 10585,4665 10768.8,4481.2 10819.38,4481.2 LED3.2
R_levelwater: LED6.2 U7.5 | length 5786.6
  Bottom Layer w30: U7.5 9637.57,5610 9620,5592.43 9620,5080 9800,4900 10695,4900 10798.53,4796.47 11828.53,4796.47 11830,4795 11915,4795 12035,4675 14265,4675 14471.45,4468.55 14471.45,4460.52 14496.97,4435 LED6.2
R_oxi: LED2.2 U7.9 | length 2043.5
  Bottom Layer w30: LED2.2 9651.97,4540 9635.8,4556.17 9635.8,4564.2 9300,4900 9300,5992.43 9317.57,6010 U7.9
R_pH: LED4.2 U7.7 | length 3829.8
  Bottom Layer w30: U7.7 9482.57,5810 9465,5792.43 9465,4995 9715,4745 10620,4745 10725.07,4639.93 11805.07,4639.93 11936.45,4508.55 11936.45,4465.52 11961.97,4440 LED4.2
R_temp: LED5.2 U7.6 | length 4859.4
  Bottom Layer w30: U7.6 9725,5715 9562.57,5715 9545,5697.43 9545,5025 9750,4820 10660,4820 10750,4730 11850,4730 11992.57,4587.43 12897.43,4587.43 13069.85,4415 LED5.2
RST: P1.4 U6.16 | length 2051.7
  Bottom Layer w30: U6.16 11640.66,5194.42 11695.58,5194.42 11840,5050 12322.43,5050 12340,5067.57 12340,6127.43 12322.43,6145 P1.4
RX_arduino: U6.7 U7.2 | length 1763.4
  Bottom Layer w30: U7.2 9735,5315 9842.43,5315 9860,5297.43 9860,5082.57 9877.57,5065 10112.43,5065 10130,5082.57 10130,5180 10525,5575 10525,5883.15 U6.7
SCK: P1.7 U6.26 | length 632.2
  Bottom Layer w30: U6.26 11648.39,6196.61 12000,5845 P1.7
SR04-Digit1: HD1.3 U7.13 | length 3203.8
  Top Layer w30: v1(8745,5880) 8745,5898.94 8775,5928.94 8775,6787.43 8817.57,6830 9347.43,6830 9365,6812.43 9365,6172.57 9325,6132.57 v1(9325,6120)
  Bottom Layer w30: HD1.3 8479.34,5880 v1(8745,5880) ; v1(9325,6120) 9615,6410 U7.13
SR04-Digit2: HD1.2 U7.14 | length 2718.4
  Top Layer w30: v1(8895,6025) 8895,6037.57 8855,6077.57 8855,6677.43 8945.07,6767.5 9227.43,6767.5 9265,6729.93 v1(9265,6270)
  Bottom Layer w30: HD1.2 8520.39,5960.39 8585,6025 v1(8895,6025) ; v1(9265,6270) 9505,6510 U7.14
T_CLK: P1.10 U6.23 | length 632.2
  Bottom Layer w30: U6.23 11795,5740.08 11990.08,5545 P1.10
T_CS: P1.11 U6.22 | length 632.2
  Bottom Layer w30: U6.22 11990.08,5445 P1.11
T_DIN: P1.12 U6.21 | length 701
  Bottom Layer w30: U6.21 11638.46,5691.54 11855,5475 11855,5362.57 11872.57,5345 P1.12
T_DO: P1.13 U6.18 | length 549.3
  Bottom Layer w30: U6.18 11698.39,5396.61 11850,5245 P1.13
T_IRQ: P1.14 U6.17 | length 549.3
  Bottom Layer w30: U6.17 11708.39,5296.61 11860,5145 P1.14
"Turbidity Analog": HD4.2 U7.26 | length 1815.2
  Bottom Layer w30: HD4.2 8357.97,4238.21 8428.21,4238.21 9220,5030 9220,5520 U7.26
TX_arduino: R21.1 R22.1 U6.6 | length 1224.7
  Bottom Layer w30: R22.1 10230,5430 10230,5505 R21.1 10235,5684.18 10638.46,6087.65 U6.6
VCC: C5.1 D1.2 IC1.1 U7.30 | length 11795.8
  Top Layer w30: v1(7950,4565) v1(8190,4565)
  Bottom Layer w30: v1(7950,4565) 7950,6949.87 8015.13,7015 13277.43,7015 13295,6997.43 13295,6487.57 13312.57,6470 13660,6470 13775,6355 C5.1 13760,6210 13760,5990 13710,5940 IC1.1 13692.43,5947.57 13692.43,6027.43 13674.85,6045 13455,6045 13405,5995 13405,5877.57 13387.43,5860 12972.57,5860 12955,5877.57 D1.2 ; v1(8190,4565) 8200,4555 8475,4555 U7.30
pads on no net: RL1.2 RL2.2 RL3.2 RL4.2 RL5.2 U6. U6.1 U6.5 U6.8 U6.9 U6.10 U6.12 U6.13 U6.14 U6.15 U6.19 U6.20 U6.24 U6.25 U7. U7.3 U7.11 U7.12 U7.16 U7.17 U7.18 U7.20 U7.21 U7.22 U7.23 U7.24 U7.27 U7.28 U7.29

## Polygon pours and split planes (outlines as drawn)
GND on Bottom Layer "NONET_L-01_P-001" (solid, pour order 3): 7785,7320 15545,7320 15550,7315 15550,2255 7790,2255 7785,2260
GND on Bottom Layer "NONET_L-01_P-001" (none, remove dead copper, pour order 2): 15550,2255 7790,2255 7785,2250

## Text inside footprints (layer, text, board x,y; h text height)
LS1: Top Overlay "-" at 10260,6265.55 h50.17 r270; Top Overlay "+" at 10260,6834.65 h50.21 r270